# EAGLE board 6_LIN_Front (EAGLE 7.7.0)
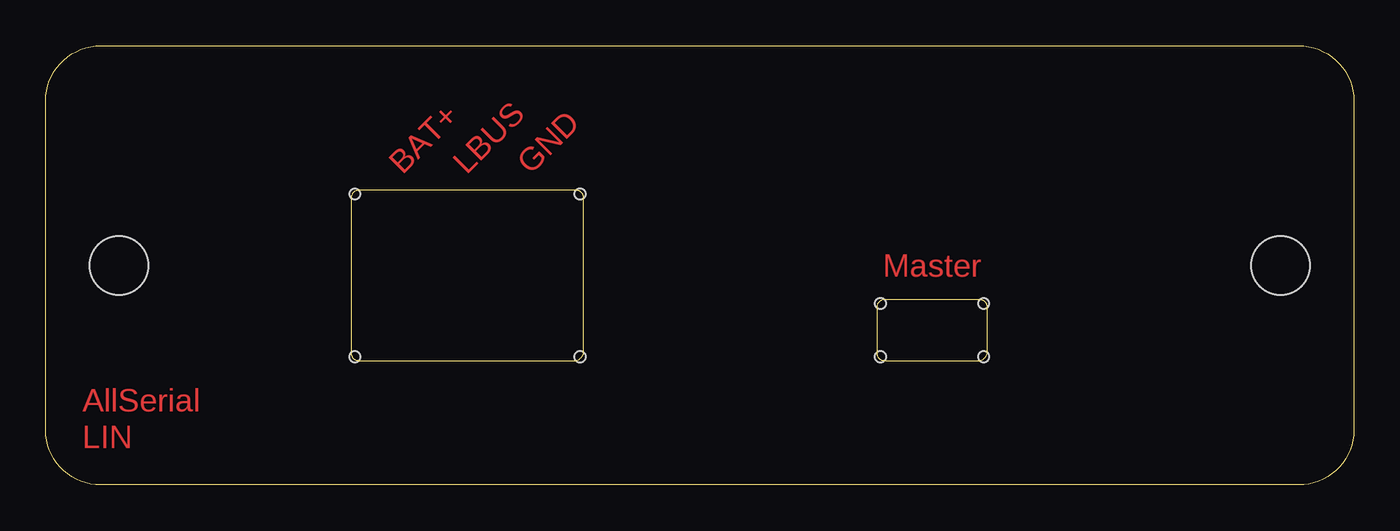
[diagram p0: board, top side]
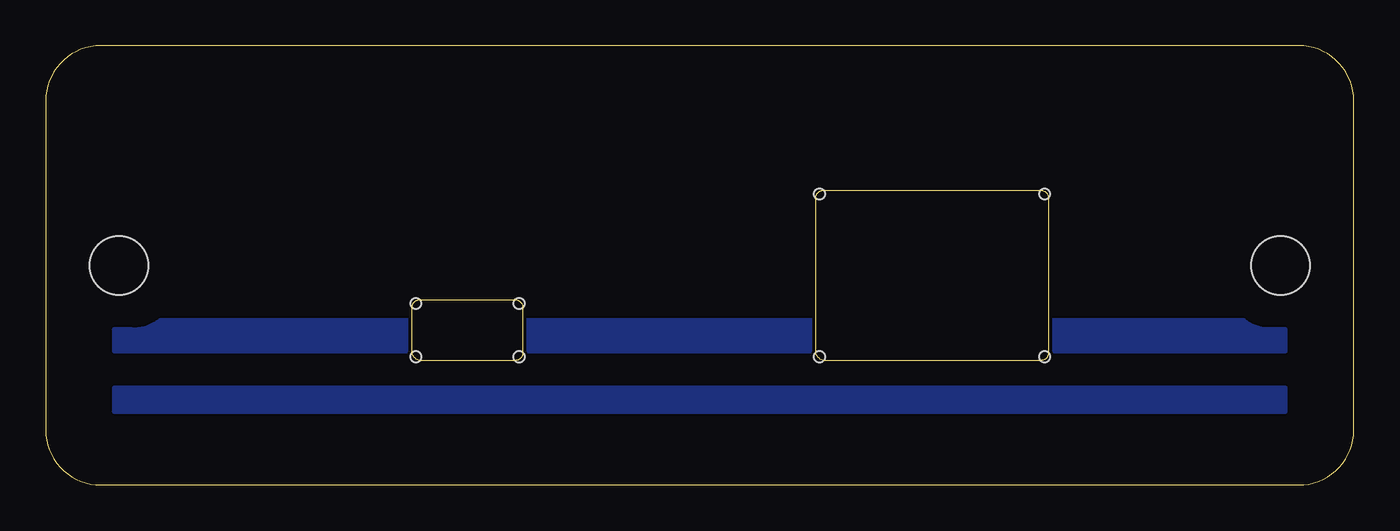
[diagram p1: board, bottom side, seen from below]

Size 71.5 x 24 mm. Coordinates in mm from the lower left corner, seen from the top.
Copper layers (1*16): Top 0.035mm / dielectric 1.5mm / Bottom 0.035mm
Design rules "default *": minimum track width 10mil, minimum drill 24mil, track to track 8mil, track to pad 8mil, pad to pad 8mil, via to via 8mil, smd to smd 8mil, copper to edge 0.2mm, drill to drill 8mil, minimum pad ring 10mil, minimum via ring 8mil, stop-mask expansion 4mil, vias tented up to drill 0mil, thermal gap 10mil

## Footprints (pad centres in the part's own frame; a part is rotated, then mirrored left to right if it is on the bottom)
PANEL = hole 3.2: -31.75,12; 31.75,12
RIA_AKL182-03 = hole 0.6: -6.15,15.9; -6.15,7; 6.15,15.9; 6.15,7
LSTB-02-1 = hole 0.6: -2.82,9.92; -2.82,7; 2.82,9.92; 2.82,7

## Placement (x,y rotation side)
E$1  [PANEL]  35.75,0 0 top
E$2  [RIA_AKL182-03]  23.05,0 0 top
E$3  [LSTB-02-1]  48.45,0 0 top

## Library data of the parts
E$1-E$3 = AllSerialv2

## Tracks (layer width: path | path; a pad name or v marks a point on that pad's centre or on a via)
S$1
  pour Bottom: 3.75,8.5 3.75,7.3 67.75,7.3 67.75,8.5 66.8,8.5 arc-45 65.26,8.99 6,9 arc-45 4.54,8.5
S$2
  pour Bottom: 3.75,4 3.75,5.3 67.75,5.3 67.75,4

## Text on the board
Top: BAT+ | LBUS | GND | Master | LIN
tStop: BAT+ | LBUS | GND | Master | LIN
bStop: AllSerial - LIN v1.2 46/18